# Altium PCB JDB-001.PcbDoc (part 2 of 2)
Units mil, origin at the board's own origin, x right, y up, seen from the top; angles counter-clockwise.
Board outline 2292 x 2004 mil, 4 copper layers (Top, Layer 2, Layer 3, Bottom), stack 24.2 mil thick; 85 components, 86 nets, 376 pads, 350 vias.
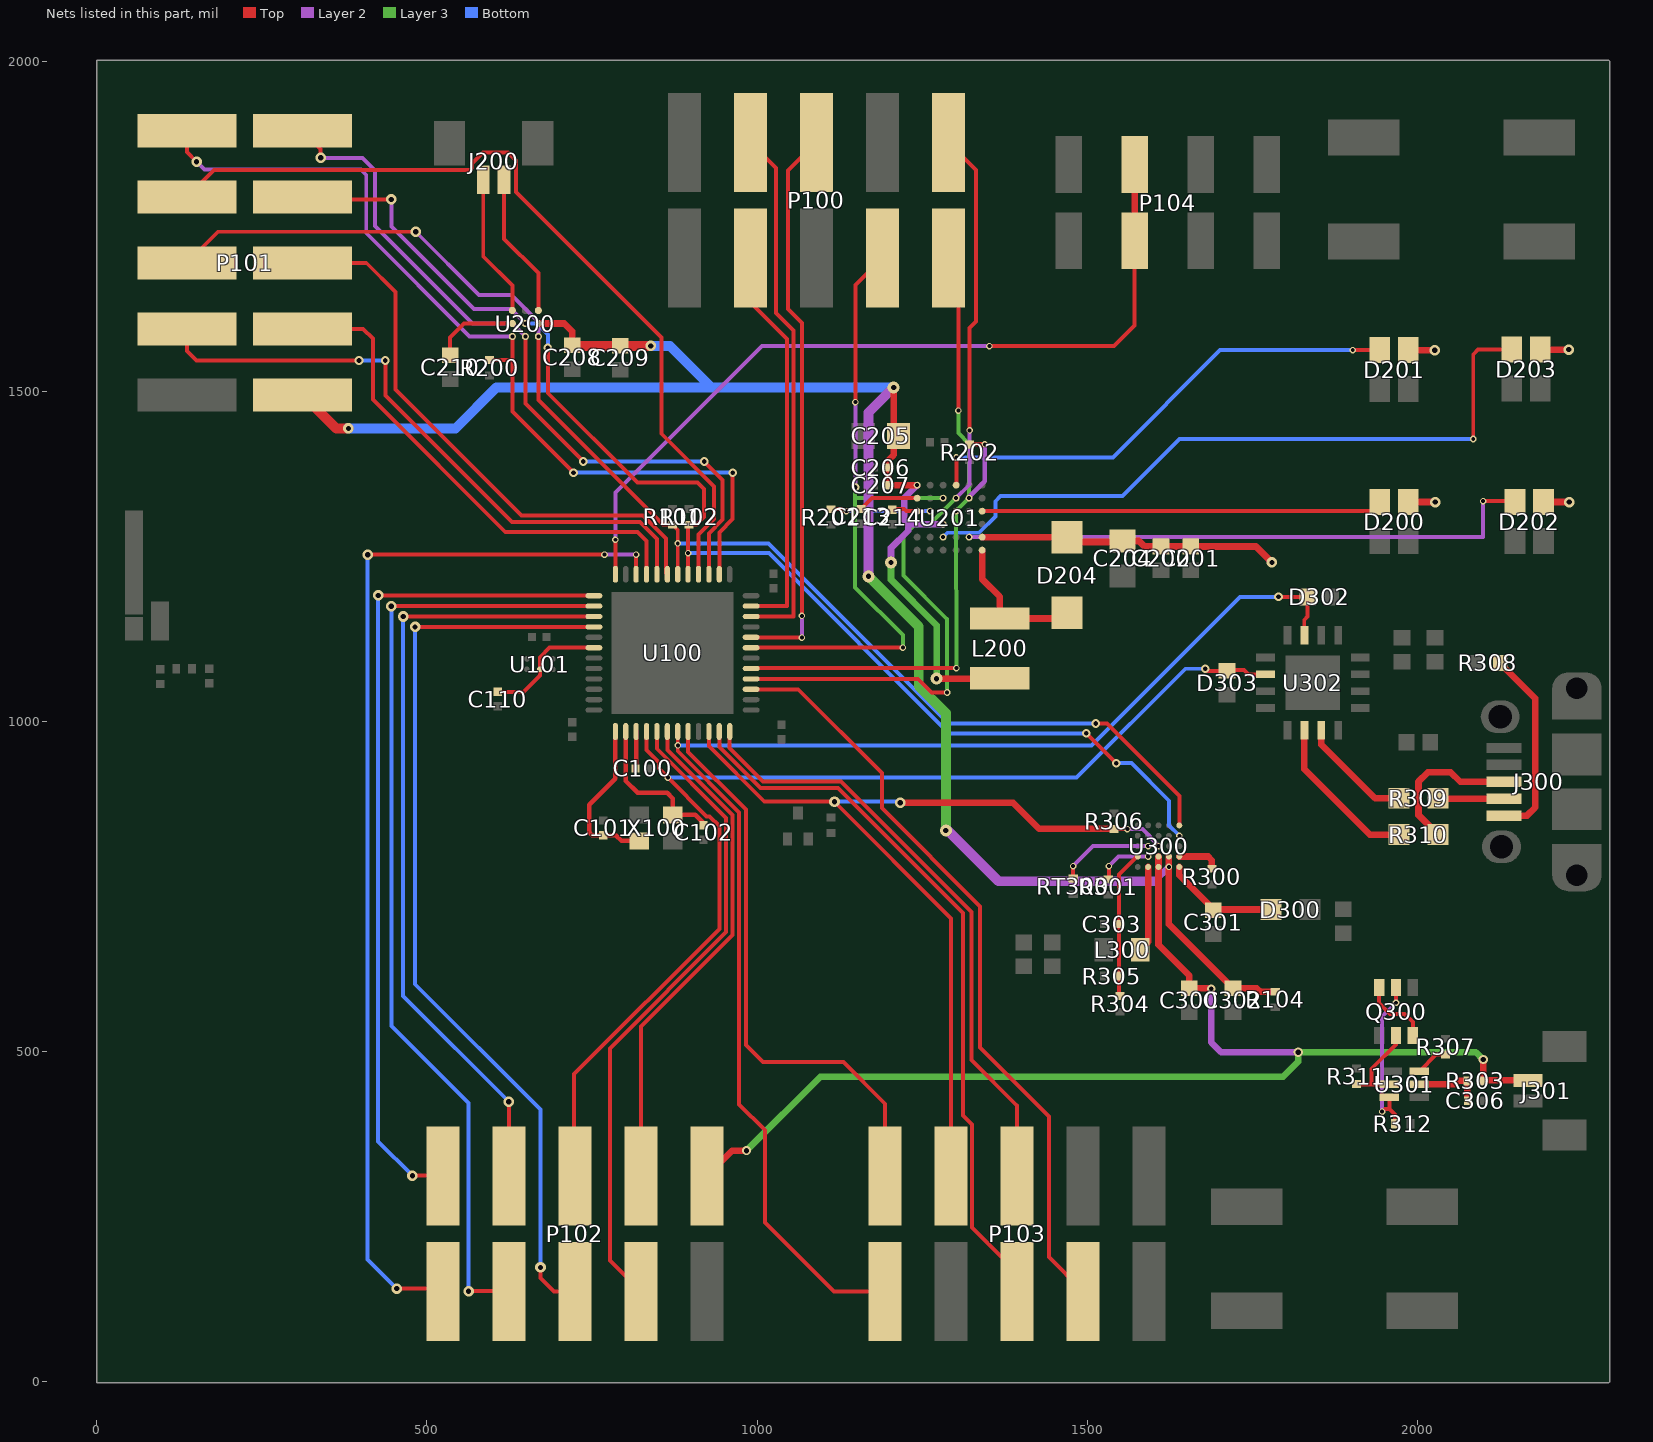
[diagram p4: the nets of this part, all layers, seen from the top]

## Via types
v1: diameter 16, hole 8, Top to Bottom, 216 vias
v2: diameter 10, hole 6, Top to Layer 2, 41 vias
v3: diameter 10, hole 6, Top to Bottom, 33 vias
v4: diameter 25.98, hole 12.99, Top to Bottom, 16 vias
v5: diameter 13, hole 7, Top to Bottom, 14 vias
v6: diameter 18, hole 8, Top to Bottom, 10 vias
v7: diameter 14, hole 8, Top to Bottom, 10 vias
v8: diameter 16, hole 8, Top to Layer 2, 4 vias
v9: diameter 14, hole 8, Top to Layer 2, 4 vias
v10: diameter 13, hole 7, Top to Layer 2, 2 vias

## Nets (pads, with @x,y where several pads share a name; then routed paths per layer and width w, separated by ;. In a path a pad name is that pad's centre, name@x,y a point inside that pad or via, vN(x,y) a via of type N, cw(c..) or ccw(c..) an arc to the next point about the centre after c; other vN are vias at no path point) (continued)
HAP_EN: P101.1 R200.2 U100.14 U200.A1 | length 1375
  Top w6: P101.1@136.5,1895 136.5,1862.5 v8(151,1848) ; R200.2@595,1547.81 628.81,1547.81 629.31,1548.31 ; v2(629.31,1583.31) 629.31,1548.31 ; v5(722,1377) 629.31,1469.69 629.31,1548.31 ; U100.14@942.87,1223.09 942.87,1286.58 963,1306.72 v5(963,1377)
  Layer 2 w6: v8(151,1848) 163,1836 400,1836 408,1828 408,1740 564.69,1583.31 v2(629.31,1583.31)
  Bottom w6: v5(722,1377) v5(963,1377)
HAP_TRIG: P101.2 U100.15 U200.B1 | length 1123.6
  Top w6: P101.2@311.5,1895 339,1867.5 v8(339,1854) ; v2(649,1583.31) 649,1482 v5(737,1394) ; v5(920,1394) 948,1366 948,1305.86 927.12,1284.98 U100.15@927.12,1223.09
  Layer 2 w6: v8(339,1854) 402,1854 421,1835 421,1751 569,1603 629.31,1603 v2(649,1583.31)
  Bottom w6: v5(737,1394) v5(920,1394)
LRA+: J200.1 U200.A3 | length 216.6
  Top w6: J200.1@585.25,1821 585.25,1704.75 629.31,1660.69 U200.A3@629.31,1622.68
LRA-: J200.2 U200.C3 | length 219.8
  Top w6: J200.2@616.75,1821 616.75,1731.25 668.68,1679.32 U200.C3@668.68,1622.68
NetC100_1: C100.1 U100.39 | length 55
  Top w7: C100.1@816.88,929.91 U100.39@816.88,984.91
NetC101_1: C101.1 U100.37 X100.1 | length 249.9
  Top w7: U100.37@785.39,984.91 785.39,913.39 746,874 746,832 750.02,827.98 C101.1@767,827.98 786.02,827.98 794.68,819.32 X100.1@821.41,819.32
NetC102_1: C102.1 U100.38 X100.3 | length 236.9
  Top w7: U100.38@801.13,984.91 801.13,909.87 819,892 864,892 872.59,883.41 X100.3@872.59,858.68 906.47,858.68 919,846.15 C102.1@919,843.02
NetC110_1: C110.1 U100.30 U101.A2 | length 189.6
  Top w6: C110.1@607,1045.02 646.35,1045.02 671,1069.68 U101.A2@671,1079.13 671,1097 685.87,1111.87 U100.30@752.91,1111.87
NetC210_1: C210.1 U200.A2 | length 129.9
  Top w6: C210.1@535,1555.11 535,1582 556,1603 U200.A2@629.31,1603
NetC213_1: C213.1 U201.B1 | length 91.6
  Top w6: C213.1@1157.79,1321.87 1174.29,1338.37 U201.B1@1242.57,1338.37
NetC214_2: C214.2 U201.C1 | length 38
  Top w6: C214.2@1205.92,1322 1223,1322 1226.32,1318.68 U201.C1@1242.57,1318.68
NetC301_1: C301.1 D300.C U300.E5 | length 172.7
  Top w10: U300.E5@1639.75,779.73 1639.75,767.37 1691.89,715.23 D300.C@1778.47,715.23
NetC303_2: C303.2 R304.2 R305.1 U300.D1 | length 224.9
  Top w6: R304.2@1550,584.04 1548.02,586.02 C303.2@1548.02,693.23 1548.02,768.02 1575.48,795.48 U300.D1@1576.76,795.48
NetC306_1: C306.1 R303.1 U301.5 | length 104.3
  Top w10: U301.5@2003.27,450.42 2056.58,450.42 2062,455.83 R303.1@2076.09,455.83 ; C306.1@2076.19,426.52 R303.1@2076.19,455.73
NetD204_A: D204.A L200.2 U201.F6 | length 208
  Top w10: U201.F6@1341,1259.63 1341,1216 1367.79,1189.21 L200.2@1367.79,1156.12 D204.A@1461.15,1156.12
NetJ300_1: J300.1 R308.1 | length 293.2
  Top w7: R308.1@2125.7,1088.3 R308.1@2125.7,1088.73
  Top w10: R308.1@2125.7,1088.3 2179,1035 2179,870 2166.55,857.55 J300.1@2131.74,857.55
NetJ300_2: J300.2 R309.1 | length 99.6
  Top w10: R309.1@2032.12,883.14 J300.2@2131.74,883.14
NetJ300_3: J300.3 R310.1 | length 234
  Top w10: R310.1@2031.53,828.73 2002,858.26 2002,909 2016,923 2051,923 2065.27,908.73 J300.3@2131.74,908.73
NetL300_1: L300.1 U300.E2 | length 130.5
  Top w10: L300.1@1580.56,654.23 1592.5,666.17 U300.E2@1592.5,779.73
NetP104_3: P104.3 U100.24 | length 1258.8
  Top w6: U100.24@785.39,1223.09 v2(785.39,1275.39) ; v2(1352,1568.75) 1540.75,1568.75 1572,1600 P104.3@1572,1728.32
  Top w10: P104.3@1572,1728.32 P104.3@1572,1843.68
  Layer 2 w6: v2(785.39,1275.39) 785.39,1346.66 1007.48,1568.75 v2(1352,1568.75)
NetQ300_2: Q300.2 R311.2 U301.2 | length 139.4
  Top w6: R311.2@1908,450.73 1908.32,450.42 1931,450.42 ; U301.2@1958,450.42 1931,450.42 ; Q300.2@1968,524.32 1968,511 1931,474 1931,450.42
NetQ300_3: Q300.3 Q300.6 | length 107
  Top w6: Q300.6@1942.41,597.15 1942.41,573.59 1959,557 1981.18,557 1993.59,544.59 Q300.3@1993.59,524.32
NetQ300_5: Q300.5 R312.2 U301.3 | length 252.9
  Top w6: v2(1947,409) 1951,413 1958,413 ; U301.3@1958,430.73 1958,413 ; R312.2@1966.19,390.73 1966.19,404.81 1958,413 ; v2(1968,574) Q300.5@1968,597.15
  Layer 2 w6: v2(1947,409) 1947,553 v2(1968,574)
NetR201_2: R201.2 U201.C2 | length 151.5
  Top w6: R201.2@1112.13,1322 1127,1322 1130.32,1318.68 v3(1135.32,1318.68)
  Bottom w6: v3(1135.32,1318.68) v3(1262.26,1318.68)
NetR202_2: R202.2 U201.B5 | length 114.3
  Top w7: R202.2@1322.19,1420 v2(1345,1420)
  Layer 2 w7: v2(1321.31,1338.37) 1321.31,1340.32 1345,1364 v2(1345,1420)
NetR300_2: R300.2 U300.D5 | length 64.7
  Top w10: U300.D5@1639.75,795.48 1683.52,795.48 1689,790 R300.2@1689,776.85
NetR301_2: R301.2 U300.D2 | length 84.3
  Top w6: R301.2@1533,762.23 v2(1533,781)
  Layer 2 w6: v2(1533,781) 1547.48,795.48 v2(1592.5,795.48)
NetR307_2: R307.2 U301.6 | length 50.3
  Top w6: U301.6@2003.27,470.1 2028.9,495.73 R307.2@2043,495.73
NetR309_2: R309.2 U302.7 | length 173.1
  Top w10: U302.7@1854.8,986.88 1854.8,965.2 1936.27,883.73 R309.2@1972.47,883.73
NetR310_2: R310.2 U302.6 | length 243.4
  Top w10: U302.6@1829.2,986.88 1829.2,927.8 1928.27,828.73 R310.2@1972.47,828.73
NetRT300_1: RT300.1 U300.C2 | length 145
  Top w6: RT300.1@1479,762.04 v2(1479,781)
  Layer 2 w6: v2(1479,781) 1509.23,811.23 v2(1592.5,811.23)
P4: P100.5 U100.8 | length 853.3
  Top w6: U100.8@991.09,1127.62 v2@1067.38,1127.62 ; v2(1068,1160) 1068,1604 1047,1625 1047,1834.5 P100.5@1090,1877.5
  Layer 2 w6: v2(1068,1127) v2(1068,1160)
P6: P100.7 U100.10 | length 809.3
  Top w6: P100.7@990,1877.5 1029,1838.5 1029,1619 1055.3,1592.7 1055.3,1159.12 ; U100.10@991.09,1159.12 1055,1159.12
P7: P100.8 U100.11 | length 604.7
  Top w6: P100.8@990,1702.5 990,1635 1045.3,1579.7 1045.3,1174.87 U100.11@991.09,1174.87
P10: P101.3 U100.16 | length 1296.4
  Top w6: P101.3@136.5,1795 177.15,1835.65 565.65,1835.65 568.41,1838.41 568.41,1845.55 584.86,1862 623,1862 635,1850 635,1802 855,1582 855,1436 935,1356 935,1307 911.37,1283.37 U100.16@911.37,1223.09
P13: P101.6 U100.19 | length 865.2
  Top w6: P101.6@311.5,1695 408,1695 452,1651 452,1503 643,1312 827.14,1312 862,1277.14 862,1225.22 U100.19@864.13,1223.09
P14: P101.7 U100.20 | length 948
  Top w6: P101.7@136.5,1595 136.5,1561.5 151,1547 v5(397,1547) ; v5(437,1547) 437,1494 629,1302 823,1302 848.38,1276.62 U100.20@848.38,1223.09
  Bottom w6: v5(397,1547) v5(437,1547)
P15: P101.8 U100.21 | length 758.5
  Top w6: P101.8@311.5,1595 403,1595 418,1580 418,1488 618.61,1287.39 818.61,1287.39 832.63,1273.37 U100.21@832.63,1223.09
P16: P102.1 U100.22 | length 1638.5
  Top w6: v1(410.12,1252.88) v2(769,1252.88) ; v1(454,141) 519.5,141 P102.1@524,136.5 ; U100.22@816.88,1223.09 v2(816.88,1252.88)
  Layer 2 w6: v2(769,1252.88) v2(816.88,1252.88)
  Bottom w6: v1(410.12,1252.88) 410.12,184.88 v1(454,141)
P17: P102.2 U100.25 | length 1272.9
  Top w6: v1@426,1190.61 U100.25@752.91,1190.61 ; v1(478,312) P102.2@523.5,312
  Bottom w6: v1(426,1191) 426,364 v1(478,312)
P18: P102.3 U100.26 | length 1453.7
  Top w6: v1(446,1174.87) U100.26@752.91,1174.87 ; v1(563,137) P102.3@623.5,137
  Bottom w6: v1(446,1174.87) 446,539 563,422 v1(563,137)
P19: P102.4 U100.27 | length 1202.8
  Top w6: v1(464,1159.12) U100.27@752.91,1159.12 ; P102.4@624,311.5 v1(624,424)
  Bottom w6: v1(464,1159.12) 464,584 v1(624,424)
P20: P102.5 U100.28 | length 1396.5
  Top w6: v1(482,1143.37) U100.28@752.91,1143.37 ; v1(672,173) 672,157 692.5,136.5 P102.5@724,136.5
  Bottom w6: v1(482,1143.37) 482,602 672,412 v1(672,173)
P22: P102.7 U100.41 | length 984.1
  Top w6: P102.7@824,136.5 777,183.5 777,505 953,681 953,854.14 848.38,958.76 U100.41@848.38,984.91
P23: P102.8 U100.42 | length 771.9
  Top w6: P102.8@824,311.5 824,537.86 963,676.86 963,858.28 864.13,957.16 U100.42@864.13,984.91
P25: P103.2 U100.44 | length 868.5
  Top w6: U100.44@895.62,984.91 895.62,953.95 983,866.57 983,510 1009,484 1131,484 1194,421 P103.2@1194,311.5
P28: P103.5 U100.47 | length 1104.3
  Top w6: U100.47@942.87,984.91 942.87,961.28 1005.14,899 1123,899 1312,710 1312,403.4 1326,389.4 1326,233.6 1394,165.6 P103.5@1394,136.5
P29: P103.6 U100.48 | length 922.8
  Top w6: U100.48@958.61,984.91 958.61,959.67 1009.28,909 1127.14,909 1325,711.14 1325,487 1394,418 P103.6@1394,311.5
P30: P103.7 U100.3 | length 1162.3
  Top w6: U100.3@991.09,1048.88 1062.12,1048.88 1189,922 1189,869 1338,720 1338,506 1442,402 1442,188.5 P103.7@1494,136.5
PMIC_INT: P103.4 R306.1 U100.46 U300.C3 | length 1404.7
  Top w4: R306.1@1541,837.42 R306.1@1541.42,837
  Top w6: U100.46@927.12,984.91 927.12,962.88 1011.47,878.53 v1(1117.32,878.53) 1294,701.85 P103.4@1294,311.5 ; R306.1@1541.42,837 v2(1561,837)
  Top w10: v1(1217,877) 1388,877 1427.58,837.42 R306.1@1541,837.42
  Layer 2 w6: v2(1561,837) 1583.7,837 1608.25,812.45 v2(1608.25,811.23)
  Bottom w6: v1(1117.32,878.53) v1@1215.47,878.53
RED1: D200.4 U201.C6 | length 588.5
  Top w6: U201.C6@1341,1318.68 D200.4@1929.5,1318.68
RED2: D201.4 U201.A4 | length 750.2
  Top w6: U201.A4@1302,1358.43 v3(1302,1400) ; v3(1902.47,1562.53) D201.4@1943.35,1562.53
  Bottom w6: v3(1302,1400) 1539,1400 1701.53,1562.53 v3(1902.47,1562.53)
RED3: D202.4 U201.E5 | length 879.9
  Top w6: v2(2100,1334) D202.4@2146.88,1334
  Layer 2 w6: v2(1321.31,1279.31) 2099.69,1279.31 v2@2099.69,1334
RED4: D203.4 U201.E3 | length 1067.8
  Top w6: v3(2085,1428) 2085,1556 2092.53,1563.53 D203.4@2143.35,1563.53
  Bottom w6: v3(1281.94,1279.31) 1288.63,1286 1336.6,1286 1361,1310.4 1361,1333.72 1368.71,1341.43 1553.71,1341.43 1640.28,1428 v3(2085,1428)
SCL: P101.5 R101.1 U100.18 U200.C1 U300.A5 | length 2049.2
  Top w6: P101.5@136.5,1695 183.5,1742 v8(483,1742) ; v2(668.68,1583.31) 668.68,1487.32 857.81,1298.19 R101.1@872,1298.19 879.87,1290.32 v3(879.87,1270) U100.18@879.87,1223.09 ; v5(1513,997) 1530,997 1639.75,887.25 U300.A5@1639.75,842.72
  Layer 2 w6: v8(483,1742) 579,1646 628,1646 668.68,1605.32 v2(668.68,1583.31)
  Bottom w6: v3(879.87,1270) 1017.14,1270 1290.14,997 v5(1513,997)
SCLK: P100.4 U100.7 U201.B3 | length 1000.2
  Top w6: U100.7@991.09,1111.87 v3@1220.87,1111.87 ; v2(1149,1484) 1149,1661.5 P100.4@1190,1702.5
  Layer 2 w6: v5(1149,1355) v2(1149,1484)
  Layer 3 w6: v5@1148.63,1354.63 1148.63,1338.37 ; v3(1221,1112) 1221,1131 1148.63,1203.37 1148.63,1338.37 ; v3(1281.94,1338.37) 1148.63,1338.37
SDA: P101.4 R102.1 U100.17 U200.B2 U300.B5 | length 1954.4
  Top w6: P101.4@311.5,1795 315.5,1791 v8(446,1791) ; v5(683,1566) 683,1498 819,1362 910,1362 920,1352 920,1310 908.19,1298.19 R102.1@897,1298.19 ; U100.17@895.62,1223.09 v3(895.62,1255) R102.1@895.62,1296.81 ; v5(1499,982) v5(1544,937)
  Layer 2 w6: v8(446,1791) 446,1750 571,1625 627,1625 v3(649,1603)
  Bottom w6: v3(649,1603) 666,1603 683,1586 v5(683,1566) ; v3(895.62,1255) 1018,1255 1291,982 v5(1499,982) ; v5(1544,937) 1567,937 1624,880 1624,842.72 v3(1639.75,826.98)
SDI: P100.1 U100.4 U201.B4 | length 1242.3
  Top w6: U100.4@991.09,1064.63 1243.63,1064.63 1264.26,1044 v3(1288,1044) ; P100.1@1290,1877.5 1332,1835.5 1332,1606 1322,1596 v2(1322,1441)
  Layer 2 w6: v3(1301.63,1338.37) 1322,1358.74 v2(1322,1441)
  Layer 3 w6: v3(1288,1044) 1288,1155 1222,1221 1222,1281 1240,1299 1262.26,1299 v3(1301.63,1338.37)
SDO: P100.2 U100.5 U201.C4 | length 954.2
  Top w6: U100.5@991.09,1080.38 991.09,1081 v3(1302,1081) ; P100.2@1290,1702.5 1305,1687.5 v3(1305,1471)
  Layer 3 w6: v3(1302,1081) v3(1301.63,1318.68) 1321.31,1338.37 1321.31,1420.68 1305,1437 v3(1305,1471)
USB_UART_RX: D303.1 P102.6 U100.40 U302.2 | length 1788.2
  Top w6: P102.6@723,312.5 723,466 943,686 943,841.52 928.2,856.32 923.68,856.32 v3(865,915) 851.32,928.68 851.32,938.2 832.63,956.89 U100.40@832.63,984.91 ; v5(1679,1080) 1682.16,1076.84 D303.1@1712,1076.84 ; D303.1@1713.21,1078.06 1738,1078.06 1744.53,1071.53 U302.2@1770.15,1071.53
  Bottom w6: v3(865,915) 1484,915 1649,1080 v5(1679,1080)
USB_UART_TX: D302.2 P103.1 U100.43 U302.15 | length 2130.7
  Top w6: U100.43@879.87,984.91 879.87,955.55 973,862.43 973,420 1012,381 1012,241 1116.5,136.5 P103.1@1194,136.5 ; v5(1790,1189) D302.2@1833.62,1189 ; U302.15@1829,1130.79 1829,1154 1833.89,1158.89 D302.2@1833.89,1188.73
  Bottom w6: v3(880,964) 1507,964 1732,1189 v5(1790,1189)
VBATT: C300.1 J301.1 P102.10 R303.2 U300.D3 U300.E3 | length 1836.3
  Top w10: P102.10@924,311.5 962.5,350 v7(984,350) ; U300.D3@1608.25,795.48 U300.E3@1608.25,779.73 1608.25,661.75 1655,615 C300.1@1655,595.84 v10@1687.16,595.84 ; R303.2@2100,455.92 v7(2100,488) ; R303.2@2100.56,456.48 J301.1@2168,456.48
  Layer 2 w10: v10(1688,595) 1688,514 1703,499 v7(1820,499)
  Layer 3 w10: v7(984,350) 1096,462 1797,462 1820,485 v7(1820,499) 2089,499 v7(2100,488)
VLED: C200.1 C201.1 C204.1 D200.1 D201.1 D202.1 D203.1 D204.C U201.E6 | length 618.6
  Top w10: U201.E6@1341,1279.31 1469.4,1279.31 D204.C@1469.79,1278.93 1476.72,1272 1552.43,1272 C204.1@1554,1273.57 1578.43,1273.57 1586.89,1265.11 C200.1@1612,1265.11 C201.1@1657,1265.11 1755.89,1265.11 v1(1780,1241) ; D200.1@1986.65,1332.53 v1(2027.47,1332.53) ; D201.1@1986.65,1562.53 v1(2026.53,1562.53) ; D203.1@2186.65,1563.53 v1(2229.53,1563.53) ; D202.1@2191.65,1332.53 v1(2230.53,1332.53)
VSYS: C205.1 C206.1 C207.1 C208.1 C209.1 C302.1 L200.1 P101.10 R104.2 U200.C2 U201.A1 U201.D3 U300.D4 U300.E4 | length 3360.6
  Top w10: U200.C2@668.68,1603 708,1603 720,1591 C208.1@720,1570.11 ; C207.1@1198.81,1358.84 C206.1@1198.81,1384.84 1198.81,1395.81 1207,1404 v6(1207,1506) ; C207.1@1199.6,1358.06 v2(1242.57,1358.06) ; v6(1272,1065) L200.1@1367.22,1065 ; U300.D4@1624,795.48 v2(1624,779.73) 1624,692.84 C302.1@1721,595.84 1757.16,595.84 1762.19,590.81 R104.2@1785,590.81
  Top w15: P101.10@311.5,1495 362.5,1444 v1(381,1444) ; C208.1@721.11,1569 v1(839,1569)
  Layer 2 w10: v6(1203,1241) 1203,1263 1229,1289 1229,1299 ; v2@1242.57,1357.57 v2(1242.57,1358.06) 1223,1338.48 1223,1305 1229,1299 ; v2(1281.94,1299) 1229,1299 ; v6(1286,835) v6@1289,835 ; 1602.27,758 v2(1624,779.73)
  Layer 2 w15: v6(1169,1220) 1169,1468 v6(1207,1506) ; v6@1289,835 1366,758 1602.27,758
  Layer 3 w10: v6(1203,1241) 1203,1215 1272,1146 v6(1272,1065)
  Layer 3 w15: v6(1169,1220) 1245,1144 1245,1054 1286,1013 v6(1286,835)
  Bottom w15: v1(381,1444) 543,1444 605,1506 931,1506 ; v1(839,1569) 868,1569 931,1506 ; v6(1207,1506) 931,1506
pads on no net: J200.0 J300.4 J300.6 J301.0 U100.2 U201.D2 U201.D4 U201.F2 U300.A1 U300.A3 U300.A4 U300.B3 U300.B4 U300.C5 U301.1 U302.4 U302.5 U302.11 U302.12 U302.14 U302.16

## Polygon pours and split planes (outlines as drawn)
1V8 on Layer 3 "L3-1V8" (solid, pour order 5): 0,-2 2290,-2 2292,0 2292,2000 2290,2002 0,2002
VLED on Layer 3 "L3-VLED" (solid, pour order 2): 1753,1610 1760,1603 1760,1203 2257,1203 2266,1212 2263,1215 2263,1608 1762,1608 1760,1610
GND on Top "Top-GND" (solid, pour order 6): 0,-2 2290,-2 2292,0 2292,2000 2290,2002 0,2002
GND on Layer 2 "L2-GND" (solid, pour order 8): 0,-2 2290,-2 2292,0 2292,2000 2290,2002 0,2002
GND on Bottom "Bot-GND" (solid, pour order 9): 0,-2 2290,-2 2292,0 2292,2000 2290,2002 0,2002

## Keep-outs
Keep-Out Layer:
  lines w4: 0,0 0,2000 2290,2000 2290,0 0,0

## Silkscreen, mask and mechanical layers (free items; w line width, h text height)
Top Overlay:
  text "SDI" at 1272,1961 h15
  text "GND" at 871,1960 h15
  text "P6" at 980,1960 h15
  text "P4" at 1078,1960 h15
  text "LED_CS" at 1152,1960 h15
  text "RESET BUTTON" at 1974,1957 h15
  text "MOTOR CONN" at 530,1945 h15
  text "RESET" at 1643,1897 h15
  text "1V8" at 1753,1897 h15
  text "GND" at 1453,1896 h15
  text "CLK" at 1553,1896 h15
  text "HAP / EN" at 10,1870.5 h15
  text "HAP / TRIG" at 391,1869 h15
  text "SDA" at 392,1790 h15
  text "P10" at 16,1785 h15
  text "SCL" at 14,1688 h15
  text "P13" at 394,1688 h15
  text "1V8" at 871,1604 h15
  text "LED_RST" at 1040,1604 h15
  text "SDO" at 1271,1604 h15
  text "P7" at 979,1603 h15
  text "SCLK" at 1165,1603 h15
  text "P14" at 15,1588 h15
  text "P15" at 395,1585 h15
  text "GND" at 14,1487 h15
  text "VSYS" at 394,1487 h15
  text "JDB-001 v1.0 (from JWB-001 v3.8)" at 168,547 h40
  text "P23" at 804,398 h15
  text "5V" at 1583,397 h15
  text "P19" at 606,396 h15
  text "VBATT" at 888,396 h15
  text "PB_IN" at 1464,396 h15
  text "P17" at 509,395 h15
  text "PMIC_INT" at 1244,395 h15
  text "P29" at 1375,395 h15
  text "P25" at 1175,394 h15
  text "UART / RX" at 704,392 h15
  text "BATTERY CONN" at 2102,312 h15
  text "P28" at 1374,38 h15
  text "P30" at 1473,38 h15
  text "GND" at 1574,38 h15
  text "P22" at 806,37 h15
  text "GND" at 905,37 h15
  text "BUTTON" at 1255,37 h15
  text "P16" at 503,36 h15
  text "P18" at 603,36 h15
  text "P20" at 704,36 h15
  text "ACTION BUTTON" at 1778,21 h15
  text "UART / RX" at 1163,9 h15
Bottom Overlay:
  drawing of 3422 lines, arcs and shapes, not listed
Board Outline:
  lines w4: 0,0 0,2000 2290,2000 2290,0 0,0
TitleBlock_Top:
  lines w5: -1840,880 -1640,880 ; -1840,3005 -1640,3005 ; -1840,5130 -1640,5130 ; -1640,155 -1640,-1045 ; 910,-1245 910,-1045 ; 910,7055 910,7255 ; 3660,-1245 3660,-1045 ; 3660,7055 3660,7255 ; 4260,-1045 2860,-1045 -1640,-1045 ; 4460,-745 8960,-745 ; 4460,-445 8960,-445 ; 4460,-145 5960,-145 ; 5960,-1045 5960,-445 5960,155 ; 6410,-1245 6410,-1045 ; 6410,7055 6410,7255 ; 8060,-1045 8060,-445 ; 8960,880 9160,880 ; 8960,3005 9160,3005 ; 8960,5130 9160,5130 ; -1640,-1045 -1640,7055 8960,7055 8960,-1045 ; -1640,-1045 8960,-1045 ; 4460,-1045 3060,-1045 3060,155 4460,155 ; 4460,-1045 8960,-1045 ; 4460,-1045 4460,155 ; 4460,155 5960,155 ; 5960,155 8960,155 8960,-1045 ; -1840,-1245 9160,-1245 9160,7255 -1840,7255 -1840,-1245
  text "1" at -488.66,7120 h70
  text "2" at 2262,7120 h70
  text "3" at 5007,7120 h70
  text "4" at 7758.01,7120 h70
  text "A" at -1765,6102 h70
  text "A" at 9035,6102 h70
  text "B" at -1765,3977 h70
  text "B" at 9035,3977 h70
  text "C" at -1765,1852 h70
  text "C" at 9035,1852 h70
  text "ENGINEER:" at 4510,55 h45
  text "TITLE:" at 6010,55 h45
  text ".Engineer" at 4910,-55 h100
  text "PCB DESIGNER:" at 4510,-240 h45
  text "D" at -1765,-268 h70
  text "D" at 9035,-268 h70
  text ".Engineer" at 4935,-380 h100
  text "DATE:" at 4510,-545 h45
  text "PART NO.:" at 6010,-545 h45
  text "REV:" at 8110,-545 h45
  text ".PRINT_DATE" at 4560,-665 h70
  text ".Company" at 3195,-674 h70
  text ".Address1" at 3195,-774 h70
  text "FILE NAME:" at 4510,-845 h45
  text "DWG NO:" at 6010,-845 h45
  text "SCALE:" at 8110,-845 h45
  text ".Address2" at 3198,-866 h70
  text ".PCB_FILE_NAME_NO_PATH" at 4560,-965 h70
  text ".Address3" at 3193,-968 h70
  text "1" at -488.66,-1180 h70
  text "2" at 2262,-1180 h70
  text "3" at 5007,-1180 h70
  text "4" at 7758.01,-1180 h70
Drill Drawing:
  drawing of 579 lines, arcs and shapes, not listed
  text "NOTES: UNLESS OTHERWISE SPECIFIED" at 5045,6525 h60
  text "1. MATERIAL: COPPER CLAD PLASTIC SHEET PER IPC-4101" at 5045,6365 h60
  text "ROHS COMPLIANT TG 140 FR-4" at 5205,6245 h60
  text "TYPE GFN FINISHED COPPER WEIGHT TO BE: 1 OZ." at 5205,6125 h60
  text "OVERALL BOARD THICKNESS TO BE .025 +/-.005." at 5205,6005 h60
  text "2. UNLESS OTHERWISE SPECIFIED ALL HOLE DIMENSIONS" at 5045,5885 h60
  text "APPLY AFTER PLATING." at 5225,5745 h60
  text "Symbol" at -1399.5,5730.94 h72
  text "Count" at -893.62,5730.94 h72
  text "Hole Size" at -293.78,5730.94 h72
  text "Plated" at 805.9,5730.94 h72
  text "Hole Type" at 1311.77,5730.94 h72
  text "Hole Length" at 2045.57,5730.94 h72
  text "Routed Path Length" at 3135.26,5730.94 h72
  text "2" at -893.62,5580.94 h60
  text "32.48mil (0.825mm)" at -293.78,5580.94 h60
  text "PTH" at 805.9,5580.94 h60
  text "Slot" at 1311.77,5580.94 h60
  text "59.06mil (1.500mm)" at 2045.57,5580.94 h60
  text "26.57mil (0.675mm)" at 3135.26,5580.94 h60
  text "3. ALL HOLES SHALL BE LOCATED WITHIN 0.003 DIAMETER OF" at 5045,5565 h60
  text "TRUE POSITION.  LAYER TO LAYER REGISTRATION SHALL BE" at 5205,5445 h60
  text "2" at -893.62,5430.94 h60
  text "35.43mil (0.900mm)" at -293.78,5430.94 h60
  text "PTH" at 805.9,5430.94 h60
  text "Slot" at 1311.77,5430.94 h60
  text "39.37mil (1.000mm)" at 2045.57,5430.94 h60
  text "3.94mil (0.100mm)" at 3135.26,5430.94 h60
  text "WITHIN 0.003.  ADD TEARDROPS AS REQUIRED SO THAT ALL" at 5205,5325 h60
  text "14" at -893.62,5280.94 h60
  text "7.00mil (0.178mm)" at -293.78,5280.94 h60
  text "PTH" at 805.9,5280.94 h60
  text "Round" at 1311.77,5280.94 h60
  text "-" at 2045.57,5280.94 h60
  text "-" at 3135.26,5280.94 h60
  text "HOLES SURROUNDED BY LAND SHALL HAVE A MINIMUM ANNULAR" at 5205,5205 h60
  text "16" at -893.62,5130.94 h60
  text "12.99mil (0.330mm)" at -293.78,5130.94 h60
  text "PTH" at 805.9,5130.94 h60
  text "Round" at 1311.77,5130.94 h60
  text "-" at 2045.57,5130.94 h60
  text "-" at 3135.26,5130.94 h60
  text "RING OF 0.002." at 5205,5085 h60
  text "33" at -893.62,4980.94 h60
  text "6.00mil (0.152mm)" at -293.78,4980.94 h60
  text "PTH" at 805.9,4980.94 h60
  text "Round" at 1311.77,4980.94 h60
  text "-" at 2045.57,4980.94 h60
  text "-" at 3135.26,4980.94 h60
  text "4. CONDUCTOR WIDTHS AND SPACING SHALL BE WITHIN +/- 20%" at 5045,4905 h60
  text "236" at -893.62,4830.94 h60
  text "8.00mil (0.203mm)" at -293.78,4830.94 h60
  text "PTH" at 805.9,4830.94 h60
  text "Round" at 1311.77,4830.94 h60
  text "-" at 2045.57,4830.94 h60
  text "-" at 3135.26,4830.94 h60
  text "OF ARTWORK ORIGINALS." at 5205,4785 h60
  text "303 Total" at -893.62,4680.94 h60
  text "5. APPLY SOLDERMASK (LIQUID PHOTO IMAGEABLE) OVER BARE" at 5045,4625 h60
  text "Slot definitions :" at -1399.5,4535.97 h60
  text "Routed Path Length" at -366.81,4535.97 h60
  text "= Calculated from tool start centre position to tool end centre position." at 735.86,4535.97 h60
  text "COPPER, SOLDERMASK TO BE PER IPC-SM-840, CLASS T," at 5205,4505 h60
  text "Hole Length" at -366.81,4435.99 h60
  text "= Routed Path Length + Tool Size = Slot length as defined in the PCB layout" at 325.99,4435.99 h60
  text "COLOR: TRANSPARENT GREEN.  ALL EXPOSED CONDUCTIVE" at 5205,4385 h60
  text "SURFACES TO BE IMMERSION GOLD OVER ELECTROLESS NICKEL" at 5205,4265 h60
  text "Layer" at -1429.5,4152.5 h60
  text "Name" at -1019.59,4152.5 h60
  text "Material" at -89.84,4152.5 h60
  text "Thickness" at 769.92,4152.5 h60
  text "Constant" at 1419.76,4152.5 h60
  text "Board Layer Stack" at 1989.62,4152.5 h60
  text "Board Layer Stack" at 3109.3,4152.5 h60
  text "(ENIG) PER IPC-4552." at 5205,4145 h60
  text "1" at -1429.5,4032.5 h60
  text "Top Overlay" at -1019.59,4032.5 h60
  text "6. WARP OR TWIST OF BOARD SHALL NOT EXCEED 0.75%." at 5045,3965 h60
  text "2" at -1429.5,3912.5 h60
  text "Top Solder" at -1019.59,3912.5 h60
  text "Solder Resist" at -89.84,3912.5 h60
  text "0.40mil" at 769.92,3912.5 h60
  text "3.5" at 1419.76,3912.5 h60
  text "7. APPLY SILKSCREEN, AS REQUIRED, USING WHITE EPOXY INK." at 5045,3805 h60
  text "3" at -1429.5,3792.5 h60
  text "Top" at -1019.59,3792.5 h60
  text "Copper" at -89.84,3792.5 h60
  text "1.40mil" at 769.92,3792.5 h60
  text "4" at -1429.5,3672.5 h60
  text "Core 1" at -1019.59,3672.5 h60
  text "FR-4" at -89.84,3672.5 h60
  text "5.00mil" at 769.92,3672.5 h60
  text "4.2" at 1419.76,3672.5 h60
  text "8. REMOVE ALL BURRS AND BREAK SHARP EDGES 0.001 MAX." at 5045,3645 h60
  text "5" at -1429.5,3552.5 h60
  text "Layer 2" at -1019.59,3552.5 h60
  text "Copper" at -89.84,3552.5 h60
  text "0.70mil" at 769.92,3552.5 h60
  text "9. FABRICATE IN ACCORDANCE WITH IPC-6012, TYPE 2, CLASS 2." at 5045,3505 h60
  text "6" at -1429.5,3432.5 h60
  text "Core 2" at -1019.59,3432.5 h60
  text "FR-4" at -89.84,3432.5 h60
  text "10.00mil" at 769.92,3432.5 h60
  text "4.2" at 1419.76,3432.5 h60
  text "10. DIMENSIONS AND TOLERANCES PER ANSI Y14.5." at 5005,3345 h60
  text "7" at -1429.5,3312.5 h60
  text "Layer 3" at -1019.59,3312.5 h60
  text "Copper" at -89.84,3312.5 h60
  text "0.70mil" at 769.92,3312.5 h60
  text "8" at -1429.5,3192.5 h60
  text "Core 3" at -1019.59,3192.5 h60
  text "FR-4" at -89.84,3192.5 h60
  text "5.00mil" at 769.92,3192.5 h60
  text "4.2" at 1419.76,3192.5 h60
  text "11. SURFACE MOUNT PAD SOLDER PLATING MUST BE FLAT TO A" at 5005,3165 h60
  text "9" at -1429.5,3072.5 h60
  text "Bottom" at -1019.59,3072.5 h60
  text "Copper" at -89.84,3072.5 h60
  text "1.40mil" at 769.92,3072.5 h60
  text "MAXIMUM OF 0.001 ABOVE BOARD SURFACE." at 5225,3025 h60
  text "10" at -1429.5,2952.5 h60
  text "Bottom Solder" at -1019.59,2952.5 h60
  text "Solder Resist" at -89.84,2952.5 h60
  text "0.40mil" at 769.92,2952.5 h60
  text "3.5" at 1419.76,2952.5 h60
  text "12. ALL COPPER SET BACK MUST BE MAINTAINED WITHIN ARTWORK" at 5005,2865 h60
  text "11" at -1429.5,2832.5 h60
  text "Bottom Overlay" at -1019.59,2832.5 h60
  text "ORIGINALS FROM ANY EDGE OF P.C. BOARD (i.e O.D., I.D," at 5225,2745 h60
  text "NON-PLATED THROUGH HOLES, NON-PLATED RADIUS, GROOVES" at 5225,2625 h60
  text "AND SLOTS)." at 5225,2485 h60
  text "13. ALL VIAS TO BE TENTED UNLESS EXPLICITLY CLEARED IN GERBERS" at 5005,2305 h60
  text "14. DO NOT CHANGE GERBERS WITHOUT WRITTEN APPROVAL" at 5005,2125 h60
  text ".PCB_Title" at 6450,-90 h100
  text "Fab Drawing" at 6720,-335 h100
  text ".PCB_PartNumber" at 6395,-660 h100
  text ".PCB_Rev" at 8295,-685 h100
TitleBlock_Bot:
  lines w5: -1840,880 -1640,880 ; -1840,3005 -1640,3005 ; -1840,5130 -1640,5130 ; -1640,-745 2860,-745 ; -1640,-445 2860,-445 ; -1640,155 1360,155 ; -740,-1045 -740,-445 ; 910,-1245 910,-1045 ; 910,7055 910,7255 ; 1360,-1045 1360,-445 1360,155 ; 1360,-145 2860,-145 ; 2860,-1045 2860,155 ; 3660,-1245 3660,-1045 ; 3660,7055 3660,7255 ; 4260,-1045 4260,155 2860,155 ; 6410,-1245 6410,-1045 ; 6410,7055 6410,7255 ; 8960,880 9160,880 ; 8960,3005 9160,3005 ; 8960,5130 9160,5130 ; 1360,155 2860,155 ; -1840,-1245 9160,-1245 9160,7255 -1840,7255 -1840,-1245 ; -1640,-1045 8960,-1045 8960,7055 -1640,7055 -1640,-1045
  text "4" at -438.01,7120 h70
  text "3" at 2313,7120 h70
  text "2" at 5058,7120 h70
  text "1" at 7808.66,7120 h70
  text "ASSEMBLY NOTES (UNLESS SPECIFIED OTHERWISE)" at 8585,6105 h100
  text "A" at -1715,6102 h70
  text "A" at 9085,6102 h70
  text "1. ALL PARTS FLUSH TO PCB" at 8585,5905 h100
  text "2. TRIM LEADS TO <=0.100\"" at 8595,5720 h100
  text "B" at -1715,3977 h70
  text "B" at 9085,3977 h70
  text "C" at -1715,1852 h70
  text "C" at 9085,1852 h70
  text "TITLE:" at 1310,55 h45
  text "ENGINEER:" at 2810,55 h45
  text ".PCB_Title" at 615,-40 h100
  text ".ENGINEER" at 2340,-50 h100
  text "PCB DESIGNER:" at 2810,-240 h45
  text "D" at -1715,-268 h70
  text "D" at 9085,-268 h70
  text "BOTTOM ASSEMBLY DRAWING" at 980,-315 h100
  text ".ENGINEER" at 2345,-375 h100
  text "REV:" at -790,-545 h45
  text "PART NO.:" at 1310,-545 h45
  text "DATE:" at 2810,-545 h45
  text ".PCBA_Rev" at -960,-640 h80
  text ".PCBA_PartNumber" at 865,-645 h80
  text ".PRINT_DATE" at 2760,-665 h70
  text ".Company" at 4094,-673 h70
  text ".Address1" at 4094,-773 h70
  text "SCALE:" at -790,-845 h45
  text "DWG NO:" at 1310,-845 h45
  text "FILE NAME:" at 2810,-845 h45
  text ".Address2" at 4093,-867 h70
  text ".PCB_FILE_NAME_NO_PATH" at 2760,-965 h70
  text ".Address3" at 4093,-968 h70
  text "4" at -438.01,-1180 h70
  text "3" at 2313,-1180 h70
  text "2" at 5058,-1180 h70
  text "1" at 7808.66,-1180 h70
TopFabNotes:
  text "ASSEMBLY NOTES (UNLESS SPECIFIED OTHERWISE)" at 4370,6540 h100
  text "1. ALL PARTS FLUSH TO PCB" at 4395,6290 h100
  text ".PCB_Title" at 6450,-90 h100
  text "Assembly Drawing" at 6495,-335 h100
  text ".PCBA_PartNumber" at 6395,-660 h100
  text ".PCBA_Rev" at 8295,-685 h100

## Dimensions
0,2002 to 2292,2000 on Drill Drawing
0,-2 to 0,2002 on Drill Drawing